# Altium PCB PCB1.PcbDoc
Units mil, origin at the board's own origin, x right, y up, seen from the top; angles counter-clockwise.
Board outline 810 x 920 mil, 2 copper layers (Top Layer, Bottom Layer); 11 components, 8 nets, 24 pads, 1 vias.
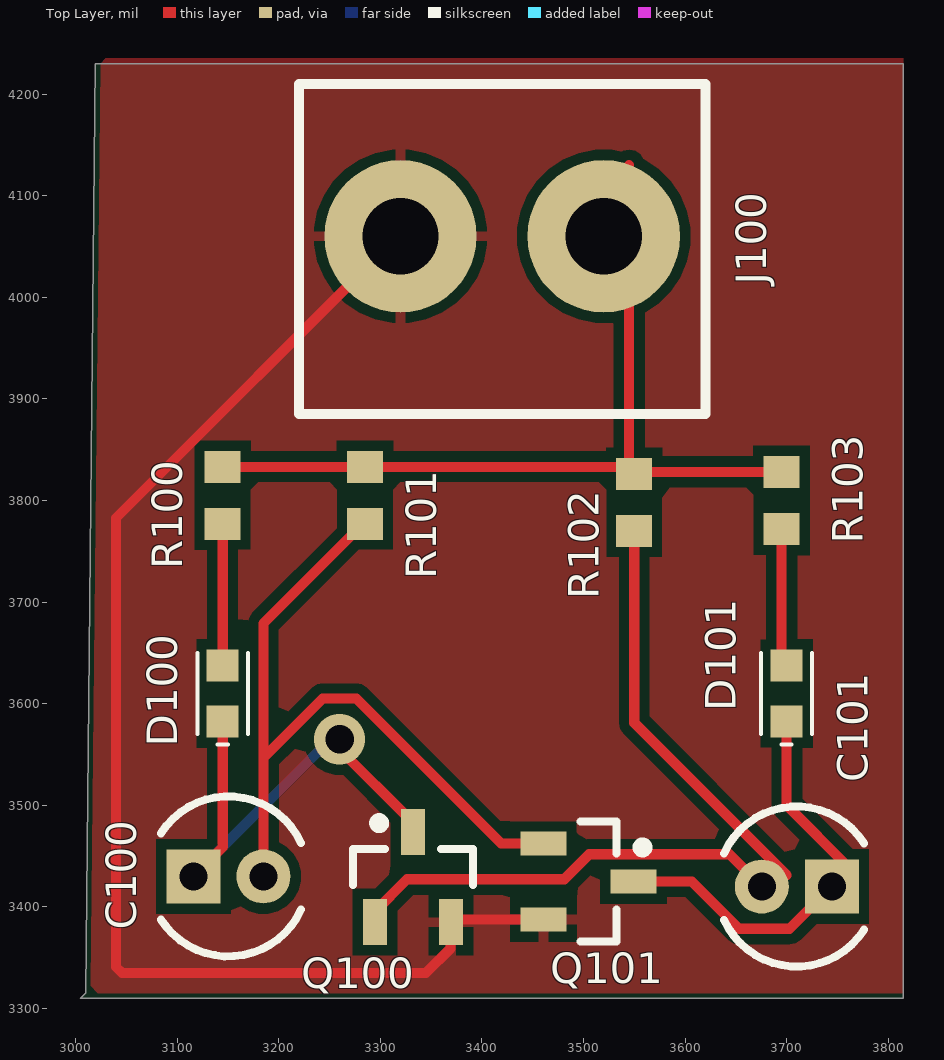
[diagram p0: Top Layer view]
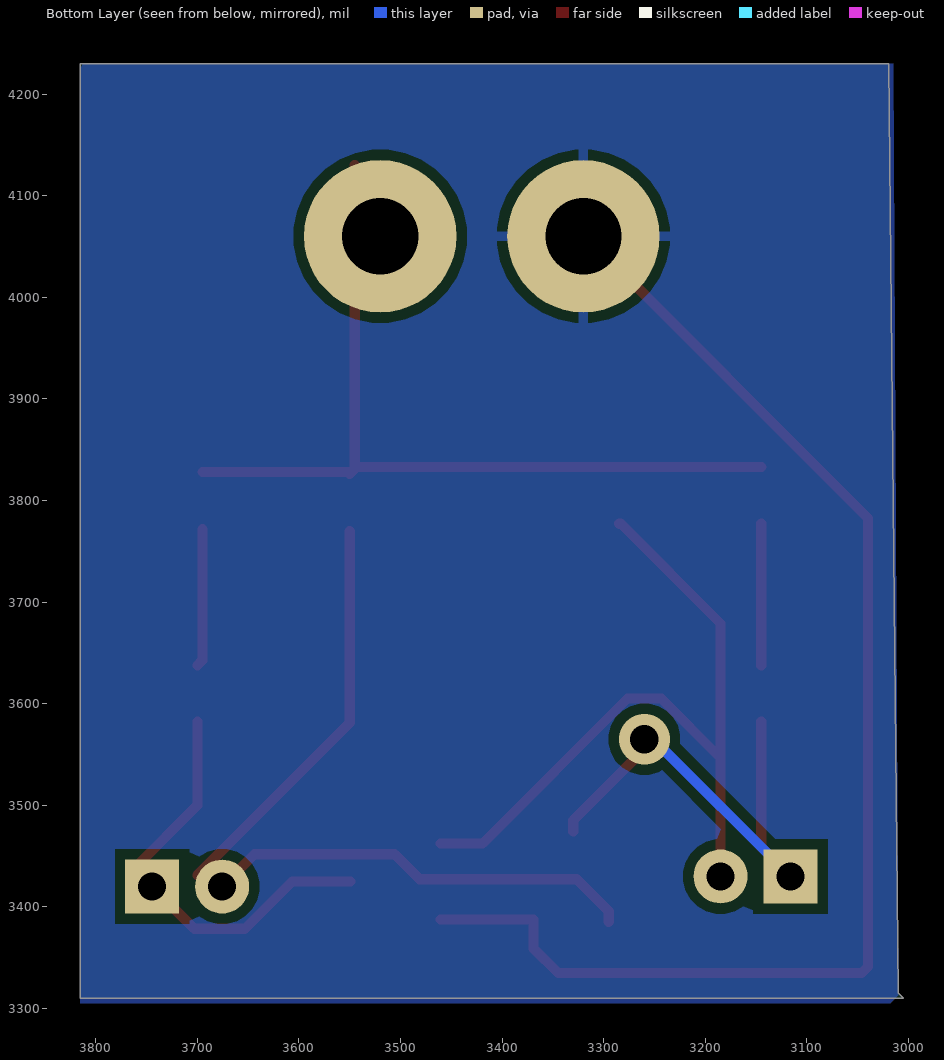
[diagram p1: Bottom Layer view, seen from below]
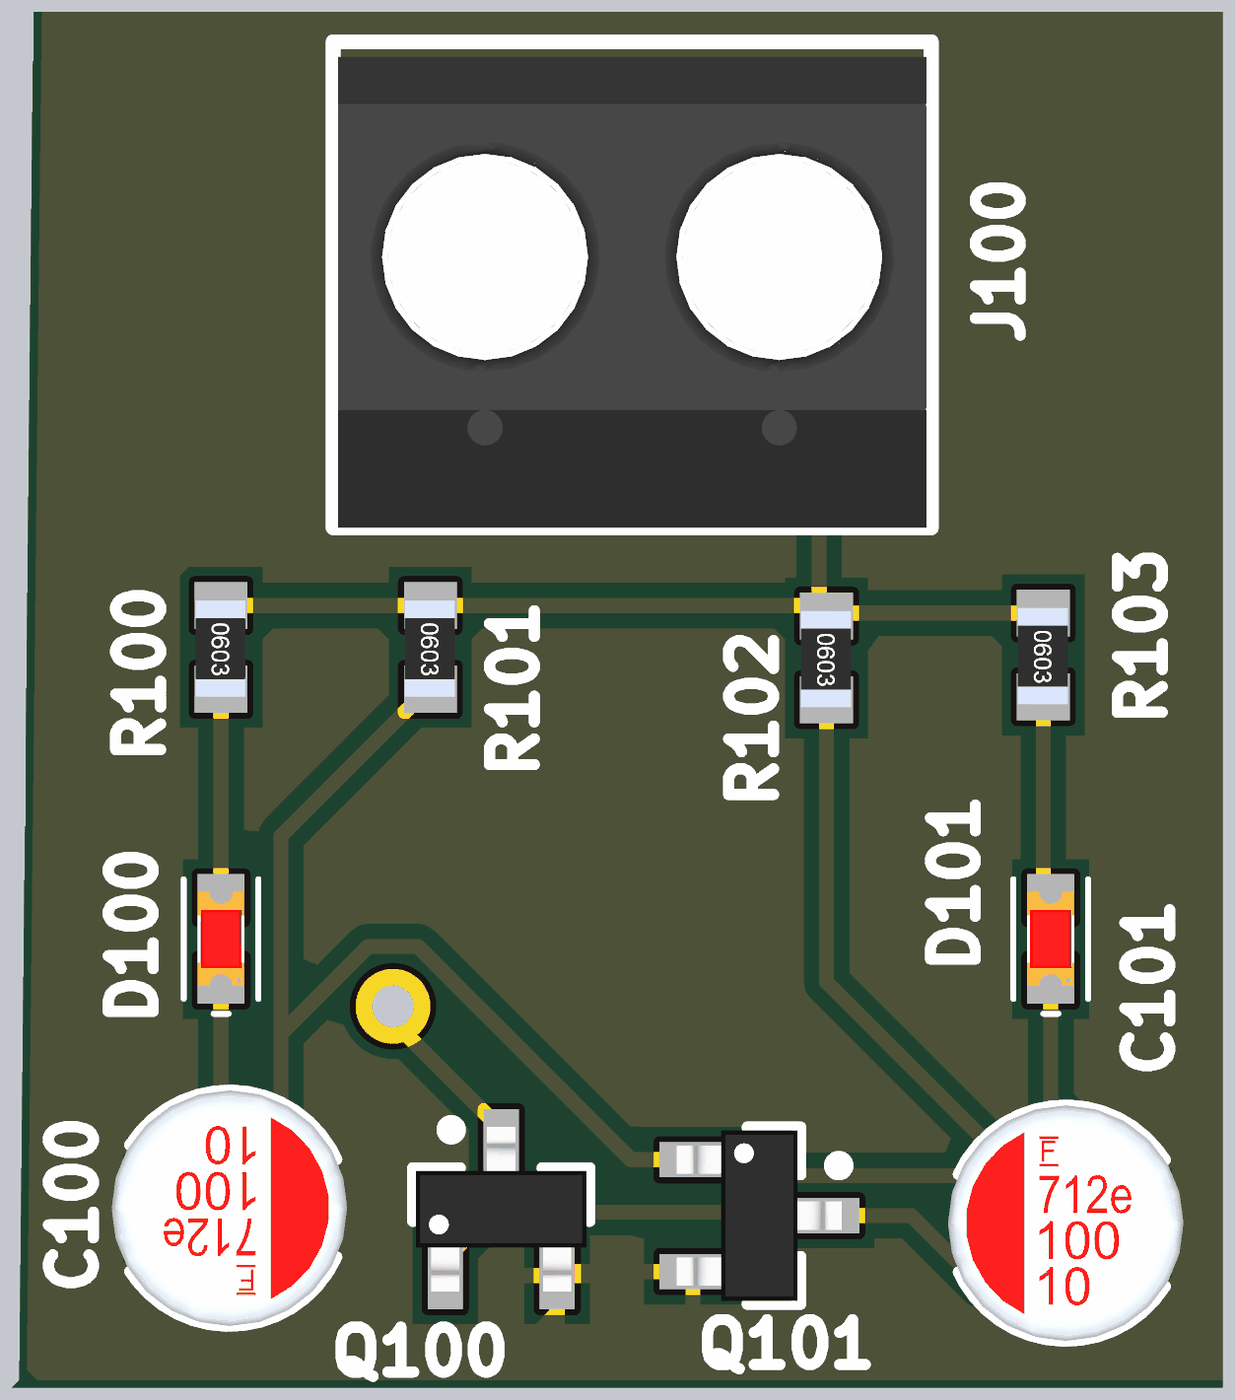
[diagram p2: 3D render of the assembled board from above, using the file's embedded part models]

## Layer stack, top to bottom
Top Solder: solder mask 0.4, Solder Resist, Dk 3.5
Top Layer: signal copper 1.4
Dielectric 1: dielectric 12.6, FR-4, Dk 4.8
Bottom Layer: signal copper 1.4
Bottom Solder: solder mask 0.4, Solder Resist, Dk 3.5

## Board outline
3815,4230 3815,3310 3005,3310 3010,3315 3019.4,4230

## Design rules (kind name [scope] priority, off if disabled: settings)
AssemblyTestPointUsage [All] p1: isadvanced=TRUE
AssemblyTestpoint [All] p1: isadvanced=TRUE testpointundercomponent=TRUE minsize=40 maxsize=100 preferedsize=60 minholesize=0 maxholesize=40 preferedholesize=32 testpointgrid=1 usegrid=TRUE gridtolerance=0.01 allowsidetop=TRUE allowsidebottom=TRUE
Clearance Clearance_KeepOut [IsKeepOut] p1: gap=0 ignorepadtopadclearanceinfootprint=FALSE
Clearance Clearance_1 [OnMid vs OnMid] p2: gap=10 ignorepadtopadclearanceinfootprint=TRUE except(0.2: Arc-SMDPad Track-SMDPad SMDPad-Text; 0.25: Arc-Arc Arc-Track Arc-Text Track-Track Track-Text Text-Text) sourcerule=41 cellrowname=All cellrowtype=0 cellcolname=All cellcoltype=0 innerlayers=TRUE
Clearance Clearance_2 [(ExistsOnLayer('Top Layer') Or ExistsOnLayer('Bottom Layer')) vs (ExistsOnLayer('Top Layer') Or ExistsOnLayer('Bottom Layer'))] p3: gap=10 ignorepadtopadclearanceinfootprint=TRUE except(0.25: Arc-Arc Arc-Track Arc-Text Track-Track Track-Text Text-Text) sourcerule=41 cellrowname=All cellrowtype=0 cellcolname=All cellcoltype=0 outerlayers=TRUE
Clearance [All] p4: gap=10 ignorepadtopadclearanceinfootprint=TRUE except(0: Arc-Hole Track-Hole SMDPad-Hole THPad-Hole Via-Hole Fill-Hole Poly-Hole Region-Hole Text-Hole) ismatrix=TRUE
ComponentClearance [All] p1: isadvanced=TRUE gap=10 collisioncheckmode=3 verticalgap=10 showdistances=FALSE
Creepage Creepage_1 [All] p1: checkdistance=10 applytopolygonpour=TRUE
FabricationTestPointUsage [All] p1: isadvanced=TRUE valid=0 allowmultiple=FALSE
FabricationTestpoint [All] p1: isadvanced=TRUE side=3 testpointundercomponent=TRUE minsize=40 maxsize=100 preferedsize=60 minholesize=0 maxholesize=40 preferedholesize=32 testpointgrid=1 allowsidetop=TRUE allowsidebottom=TRUE usegrid=TRUE gridtolerance=0.01
FanoutControl Fanout_BGA [IsBGA] p1: isadvanced=TRUE bgadir=Out bgaviamode=Centered fanoutstyle=Auto fanoutdirection=Alternating viagrid=1 // Fanout_BGA (Default Rule)
FanoutControl Fanout_LCC [IsLCC] p2: isadvanced=TRUE bgadir=Out bgaviamode=Centered fanoutstyle=Auto fanoutdirection=Alternating viagrid=1 // Fanout_LCC (Default Rule)
FanoutControl Fanout_SOIC [IsSOIC] p3: isadvanced=TRUE bgadir=Out bgaviamode=Centered fanoutstyle=Auto fanoutdirection=Alternating viagrid=1 // Fanout_SOIC (Default Rule)
FanoutControl Fanout_Small [(CompPinCount < 5)] p4: isadvanced=TRUE bgadir=Out bgaviamode=Centered fanoutstyle=Auto fanoutdirection=OutThenIn viagrid=1 // Fanout_Small (Default Rule)
FanoutControl Fanout_Default [All] p5: isadvanced=TRUE bgadir=Out bgaviamode=Centered fanoutstyle=Auto fanoutdirection=Alternating viagrid=1 // Fanout_Default (Default Rule)
Height [All] p1: isadvanced=TRUE minheight=0 maxheight=1000 prefheight=500
HoleSize [All] p1: isadvanced=TRUE absolutevalues=TRUE maxlimit=100 minlimit=1 maxpercent=80.000 minpercent=20.000
HoleToHoleClearance [All] p1: isadvanced=TRUE gap=10 allowstackedmicrovias=TRUE
LayerPairs [All] p1: isadvanced=TRUE enforce=TRUE
MinimumSolderMaskSliver [All] p1: isadvanced=TRUE minsoldermaskwidth=10
NetAntennae [All] p1: isadvanced=TRUE netantennaetolerance=0
PasteMaskExpansion [All] p1: isadvanced=TRUE expansion=0
PlaneClearance [All] p1: isadvanced=TRUE clearance=20
PlaneConnect [All] p1: isadvanced=TRUE planeconnectstyle=Relief reliefexpansion=20 reliefentries=4 reliefconductorwidth=10 reliefairgap=10
PolygonConnect [All] p1: connectstyle=Relief reliefconductorwidth=10 reliefentries=4 polygonreliefangle="90 Angle" airgapwidth=10
RoomDefinition Sheet1 [InComponentClass('Sheet1')] p1: isadvanced=TRUE confinementstyle=ConfineIn formatcopy=TRUE lockcomponents=FALSE outline 2251.42,1917.4 5401.42,1917.4 5401.42,2367.4 2251.42,2367.4
RoutingCorners [All] p1: isadvanced=TRUE cornerstyle=45-Degree minsetback=100 maxsetback=100
RoutingPriority [All] p1: isadvanced=TRUE routingpriority=0
RoutingVias [All] p1: holewidth=28 width=50 viastyle="Through Hole" minholewidth=28 minwidth=50 maxholewidth=28 maxwidth=50
ShortCircuit [All] p1: isadvanced=TRUE allowed=FALSE
SilkToSilkClearance [All] p1: isadvanced=TRUE silktosilkclearance=10
SilkToSolderMaskClearance [IsPad] p1: isadvanced=TRUE minsilkscreentomaskgap=10 clearancetoexposedcopper=TRUE
SolderMaskExpansion [All] p1: isadvanced=TRUE expansion=4 istentingtop=FALSE
SupplyNets "Schematic Supply Nets_1" [InNet('GND')] p1: isadvanced=TRUE voltage=0.000
SupplyNets "Schematic Supply Nets" [InNet('9V')] p2: isadvanced=TRUE voltage=0.000
UnRoutedNet [All] p1: isadvanced=TRUE
UnpouredPolygon [All] p1: isadvanced=TRUE
Width [All] p1: maxlimit=10 minlimit=10 preferedwidth=10
4 further rules are at their usual default settings.

## Components (designator, comment, footprint, x,y, rotation, side; value= is the part's Value field where it differs from the comment)
C100 "Cap2" CAPR5-4X5 3150.55,3430 r0 top value=10uF
C101 "Cap2" CAPR5-4X5 3710,3420 r180 top value=10uF
D100 "LED_SMD" 0603_LED 3145,3610 r270 top value=RED
D101 "LED_SMD" 0603_LED 3700,3610 r270 top value=RED
J100 "2 PIN" "Header 2_PIN" 3520,4060 r180 top
Q100 "MMBT4401" SOT23_N 3332.4,3429.29 r90 top
Q101 "MMBT4401" SOT23_N 3505,3425 r0 top
R100 "Res1" R0603 3145,3805 r270 top value=470R
R101 "Res1" R0603 3285,3805 r270 top value=47K
R102 "Res1" R0603 3550,3798 r270 top value=47K
R103 "Res1" R0603 3695,3800 r270 top value=470R

## Footprints (in the part's own frame and the unit in brackets; to place one, negate y for a bottom-side part, rotate by r counter-clockwise, add the part's x,y. Pads: shape width x height; smd on the part's side, far side on the other; paste and mask are expansions set on the pad)
0603_LED [mm] "LED"
  rect 0.8x0.8 smd: 1(-0.7,0) 2(0.7,0)
  silkscreen extent -1.02,-0.64 1.27,0.64, body extent -0.8,-0.4 0.8,0.4, height 0.6
CAPR5-4X5 [mm] "Capacitor; 2 Leads"
  rect 1.35x1.35 hole 0.7: 1(-0.875,0)
  round 1.35 hole 0.7: 2(0.875,0)
  silkscreen extent -1.69,-2 1.82,2, body extent -2,-2 2,2, height 4.71
"Header 2_PIN" [mil] "200 mils"
  round 150 hole 75: 1(0,0) 2(200,0)
  silkscreen extent -100,-150 300,175, body extent -97,-140 297,175, height 395
R0603 [mm] "Chip Capacitor, Body 1.6x0.8mm, IPC High Density"
  rect 0.8x0.9 smd: 1(-0.711,0) 2(0.711,0)
  body extent -0.8,-0.43 0.84,0.41, height 0.41
SOT23_N [mm] "SOT23, 3-Leads, Body 2.9x1.3mm, Pitch 0.95mm, Lead Span 2.3mm - Reverse Pinning, IPC Medium Density"
  rect 1.15x0.6 smd: 1(1.125,0) 2(-1.125,-0.95) 3(-1.125,0.95)
  silkscreen extent -0.2,-1.5 1.47,1.5, body extent -1.4,-1.45 1.4,1.45, height 1.3

## Part data
C100 C101: "Capacitor", PackageDescription="Capacitor; 2 Leads", PackageReference=CAPR5-4X5
D100 D101: "LED RED CLEAR 0603 SMD", Digikey Part Number=160-1447-1-ND, Manufacturer Part Number=LTST-C191KRKT, PackageDescription="1.60mm L x 0.80mm W", PackageReference="0603 (1608 Metric)"
J100: library part Connector_2Pin
Q100 Q101: library part NPN, "NPN Bipolar Transistor", Digikey Part Number=MMBT4401LT1GOSCT-ND, Manufacturer="ON Semiconductor", Manufacturer Part Number=MMBT4401LT1G, PackageDescription="SOT-23-3 (TO-236)", PackageReference="SOT-23-3 (TO-236)"
R100 R101 R102 R103: "Resistor", PackageDescription="Axial Device, Thru-Hole; 2 Leads; 0.3 in Pin Spacing", PackageReference=AXIAL-0.3

## Via types
v1: diameter 50, hole 28, Top Layer to Bottom Layer, 1 vias

## Nets (pads, with @x,y where several pads share a name; then routed paths per layer and width w, separated by ;. In a path a pad name is that pad's centre, name@x,y a point inside that pad or via, vN(x,y) a via of type N, cw(c..) or ccw(c..) an arc to the next point about the centre after c; other vN are vias at no path point)
9V: J100.1 R100.1 R101.1 R102.1 R103.1 | length 859.8
  Top Layer w10: R100.1 R101.1 3543,3833 R102.1 ; J100.1@3545,4130 3545,3831 R102.1 ; R103.1 3552,3828 R102.1
GND: J100.2 Q100.2 Q101.2 | length 1298.2
  Top Layer w10: J100.2 3317.32,4060 3040,3782.68 3040,3340.86 3045.86,3335 3345,3335 3369.29,3359.29 3369.29,3387.6 Q101.2
NetC100_1: C100.1 D100.2 Q100.1 | length 483.9
  Top Layer w10: C100.1 3145,3458.9 D100.2 ; v1(3260,3565) 3260,3555.12 3330,3485.12 Q100.1@3330,3474.29
  Bottom Layer w10: C100.1 3251.1,3565 v1(3260,3565)
NetC100_2: C100.2 Q101.3 R101.2 | length 748.6
  Top Layer w10: C100.2 3185,3546.57 ; R101.2 3283.03,3777 3185,3678.97 3185,3546.57 ; Q101.3 3419.17,3462.4 3276.57,3605 3243.43,3605 3185,3546.57
NetC101_1: C101.1 D101.2 Q101.1 | length 402.1
  Top Layer w10: Q101.1 3606.56,3425 3653.14,3378.43 3702.87,3378.43 C101.1 ; D101.2 3700,3500 C101.1@3762.22,3437.78
NetC101_2: C101.2 Q100.3 R102.2 | length 828.7
  Top Layer w10: Q100.3 3295,3395.83 3326.4,3427.22 3481.19,3427.22 3505.78,3451.81 3643.74,3451.81 C101.2 ; R102.2 3550,3581.1 3699.97,3431.13
NetD100_1: D100.1 R100.2 | length 139.4
  Top Layer w10: D100.1 R100.2
NetD101_1: D101.1 R103.2 | length 136.5
  Top Layer w10: R103.2 3695,3642.56 D101.1

## Polygon pours and split planes (outlines as drawn)
GND on Top Layer "GND_L01_P000" (solid, pour order 0): 3015,3315 3815,3315 3815,4235 3030,4235 3025,4230
GND on Bottom Layer "GND_L02_P001" (solid, pour order 1): 3010,3310 3015,3305 3815,3305 3815,4225 3820,4230 3015,4230

## Silkscreen, mask and mechanical layers (free items; w line width, h text height)
Mechanical 1:
  the board outline again, w25